# Altium PCB THYRISTOR POWER REGULATOR_V2..PcbDoc
Units mm, origin at the board's own origin, x right, y up, seen from the top; angles counter-clockwise.
Board outline 60.28 x 25.25 mm, 2 copper layers (Top Layer, Bottom Layer), stack 1.071 mm thick; 17 components, 9 nets, 27 pads, 8 vias.
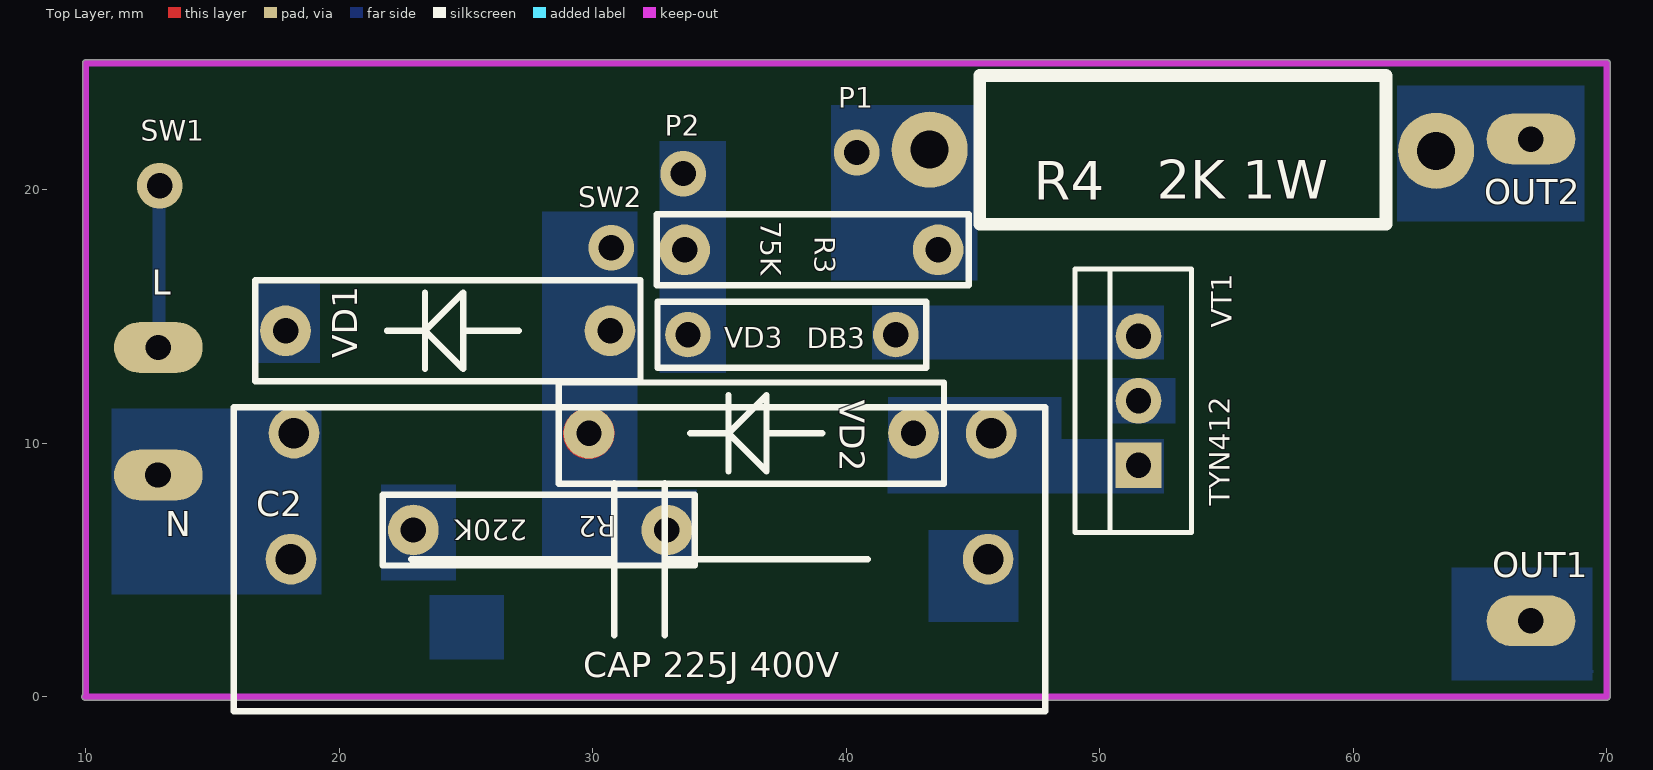
[diagram p0: Top Layer view]
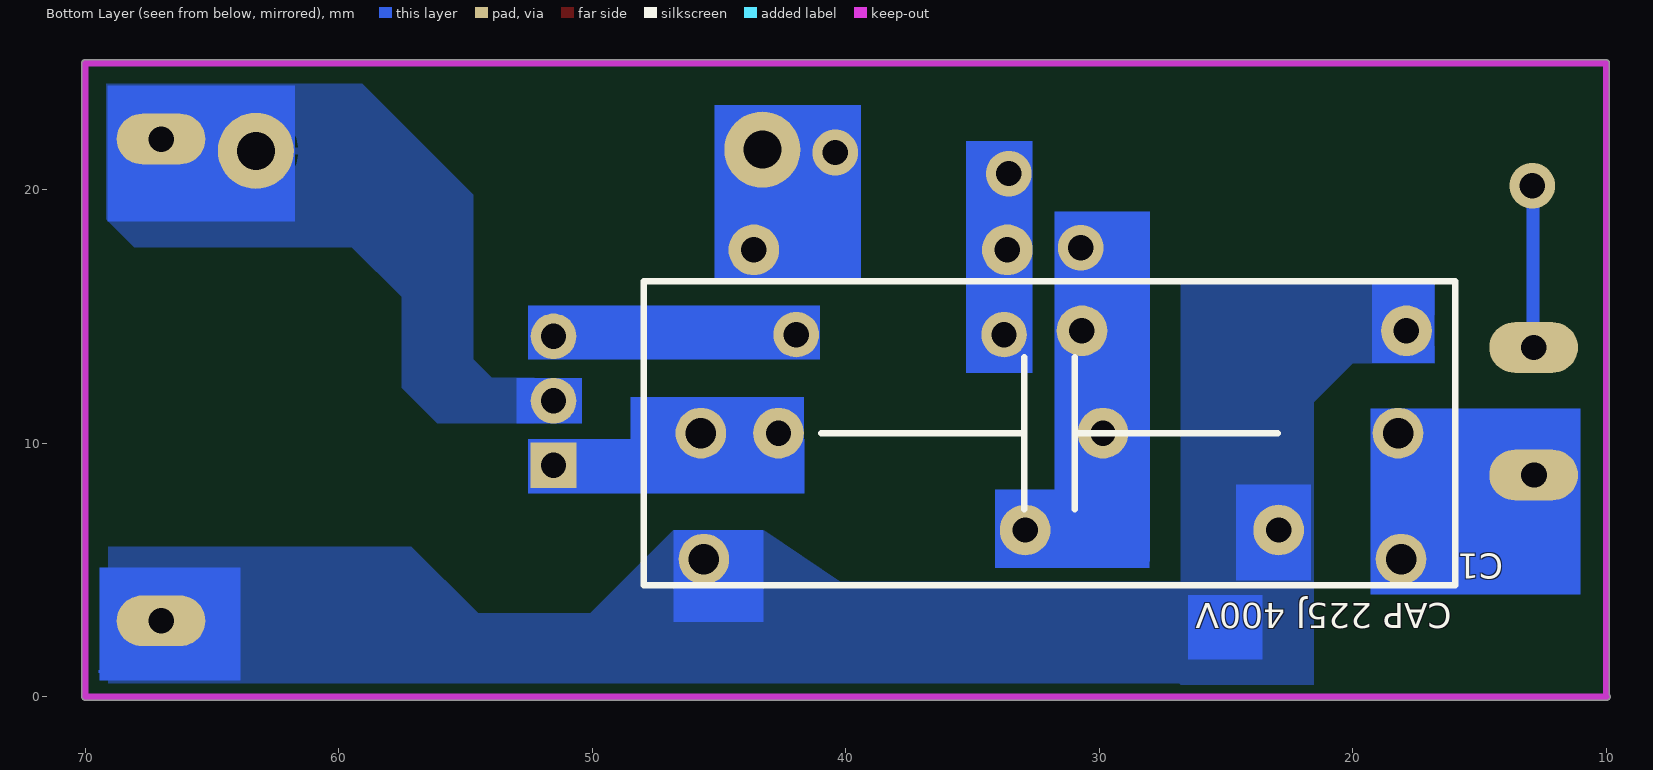
[diagram p1: Bottom Layer view, seen from below]
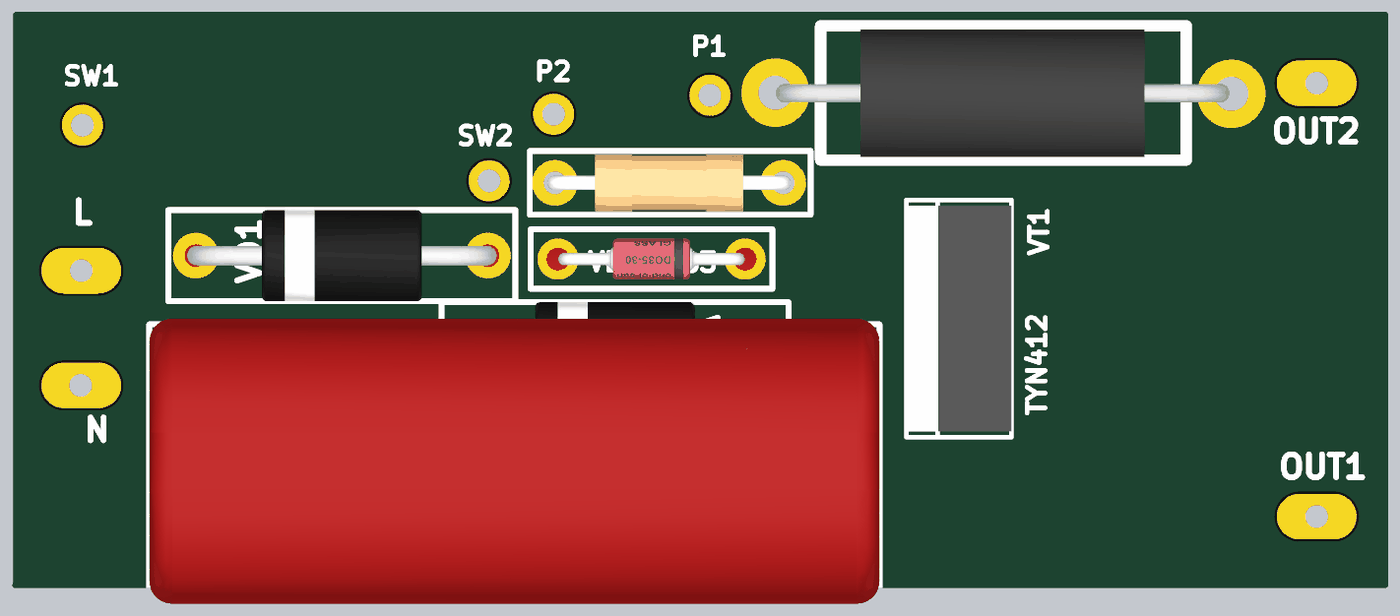
[diagram p2: 3D render of the assembled board from above, using the file's embedded part models]

## Layer stack, top to bottom
Top Solder: solder mask 0.0102, Solder Resist, Dk 3.5
Top Layer: signal copper 0.0356
Dielectric 1: dielectric 1, FR-4, Dk 4.8
Bottom Layer: signal copper 0.0356
Bottom Solder: solder mask 0.0102, Solder Resist, Dk 3.5

## Board outline
9.873,0.083 ccw(c9.97,0) 9.97,-0.127 70,-0.127 ccw(c70,0) 70.127,0 70.127,25 ccw(c70,25) 70,25.127 10,25.127 ccw(c10,25) 9.873,25

## Design rules (kind name [scope] priority, off if disabled: settings)
Clearance [All] p1: gap=0.3 ignorepadtopadclearanceinfootprint=FALSE except(0.2: Text-Text Text-Hole)
ComponentClearance [All] p1: gap=0.1 collisioncheckmode=3 verticalgap=0.1 showdistances=FALSE
DiffPairsRouting [All] p1: maxlimit=0.254 minlimit=0.254 mostfreqgap=0.254 substack1={A23D90DD-733B-49C5-8102-56B3D284E3A0} toplayer_{a23d90dd-733b-49c5-8102-56b3d284e3a0}_minwidth=0.381 toplayer_{a23d90dd-733b-49c5-8102-56b3d284e3a0}_maxwidth=0.381 toplayer_{a23d90dd-733b-49c5-8102-56b3d284e3a0}_prefwidth=0.381 bottomlayer_{a23d90dd-733b-49c5-8102-56b3d284e3a0}_minwidth=0.381 bottomlayer_{a23d90dd-733b-49c5-8102-56b3d284e3a0}_maxwidth=0.381 bottomlayer_{a23d90dd-733b-49c5-8102-56b3d284e3a0}_prefwidth=0.381 toplayer_minwidth=0.381 toplayer_maxwidth=0.381 toplayer_prefwidth=0.381 bottomlayer_minwidth=0.381 bottomlayer_maxwidth=0.381 bottomlayer_prefwidth=0.381 substack2={0B3DB408-A969-412D-8C07-BA8AE97219D9} toplayer_{0b3db408-a969-412d-8c07-ba8ae97219d9}_minwidth=0.381 toplayer_{0b3db408-a969-412d-8c07-ba8ae97219d9}_maxwidth=0.381 toplayer_{0b3db408-a969-412d-8c07-ba8ae97219d9}_prefwidth=0.381 bottomlayer_{0b3db408-a969-412d-8c07-ba8ae97219d9}_minwidth=0.381 bottomlayer_{0b3db408-a969-412d-8c07-ba8ae97219d9}_maxwidth=0.381 bottomlayer_{0b3db408-a969-412d-8c07-ba8ae97219d9}_prefwidth=0.381 substack3={378827E6-B38F-4565-9D2F-710D8D441C30} toplayer_{378827e6-b38f-4565-9d2f-710d8d441c30}_minwidth=0.381 toplayer_{378827e6-b38f-4565-9d2f-710d8d441c30}_maxwidth=0.381 toplayer_{378827e6-b38f-4565-9d2f-710d8d441c30}_prefwidth=0.381 bottomlayer_{378827e6-b38f-4565-9d2f-710d8d441c30}_minwidth=0.381 bottomlayer_{378827e6-b38f-4565-9d2f-710d8d441c30}_maxwidth=0.381 bottomlayer_{378827e6-b38f-4565-9d2f-710d8d441c30}_prefwidth=0.381 substack4={1E65D4A7-266F-4925-B814-5E9C4A66F8EE} toplayer_{1e65d4a7-266f-4925-b814-5e9c4a66f8ee}_minwidth=0.381 toplayer_{1e65d4a7-266f-4925-b814-5e9c4a66f8ee}_maxwidth=0.381 toplayer_{1e65d4a7-266f-4925-b814-5e9c4a66f8ee}_prefwidth=0.381 bottomlayer_{1e65d4a7-266f-4925-b814-5e9c4a66f8ee}_minwidth=0.381 bottomlayer_{1e65d4a7-266f-4925-b814-5e9c4a66f8ee}_maxwidth=0.381 bottomlayer_{1e65d4a7-266f-4925-b814-5e9c4a66f8ee}_prefwidth=0.381 substack5={93C5D03E-862D-45F8-9871-970EEA9B3F11} toplayer_{93c5d03e-862d-45f8-9871-970eea9b3f11}_minwidth=0.381 toplayer_{93c5d03e-862d-45f8-9871-970eea9b3f11}_maxwidth=0.381 toplayer_{93c5d03e-862d-45f8-9871-970eea9b3f11}_prefwidth=0.381 bottomlayer_{93c5d03e-862d-45f8-9871-970eea9b3f11}_minwidth=0.381 bottomlayer_{93c5d03e-862d-45f8-9871-970eea9b3f11}_maxwidth=0.381 bottomlayer_{93c5d03e-862d-45f8-9871-970eea9b3f11}_prefwidth=0.381 maxuncoupledlength=12.7
Height [All] p1: minheight=0 maxheight=30 prefheight=30
HoleSize [All] p1: absolutevalues=TRUE maxlimit=6 minlimit=0.01 maxpercent=80.000 minpercent=20.000
HoleToHoleClearance [All] p1: gap=0.1 allowstackedmicrovias=TRUE
MinimumSolderMaskSliver [All] p1: minsoldermaskwidth=0.1
PlaneConnect [All] p1: pad.planeconnectstyle=Relief pad.reliefexpansion=0.5 pad.reliefentries=4 pad.reliefconductorwidth=0.5 pad.reliefairgap=0.15 via.planeconnectstyle=Direct via.reliefexpansion=0.5 via.reliefentries=4 via.reliefconductorwidth=0.5 via.reliefairgap=0.15
PolygonConnect VQFN20 [HasFootprint('VQFN20')] p1: connectstyle=Direct reliefconductorwidth=0.254 reliefentries=4 polygonreliefangle="90 Angle" airgapwidth=0.254
PolygonConnect [All] p2: thpad.connectstyle=Relief thpad.reliefconductorwidth=0.3 thpad.reliefentries=4 thpad.polygonreliefangle="90 Angle" thpad.airgapwidth=0.15 smdpad.connectstyle=Relief smdpad.reliefconductorwidth=0.3 smdpad.reliefentries=4 smdpad.polygonreliefangle="90 Angle" smdpad.airgapwidth=0.15 via.connectstyle=Direct via.reliefconductorwidth=0.3 via.reliefentries=4 via.polygonreliefangle="90 Angle" via.airgapwidth=0.15
RoutingVias [All] p1: holewidth=0.1 width=0.1 viastyle="Through Hole" minholewidth=0.11 minwidth=0.1 maxholewidth=2 maxwidth=1
ShortCircuit [All] p1: allowed=TRUE
SilkToSolderMaskClearance [IsPad] p1: minsilkscreentomaskgap=0.1 clearancetoexposedcopper=TRUE
SolderMaskExpansion SolderMaskExpansion_Via [IsVia] p1: expansion=0.102 istentingtop=TRUE
SolderMaskExpansion [All] p2: expansion=0.01 istentingtop=FALSE
UnRoutedNet [All] p1: checkbadconnections=TRUE
Width [All] p1: maxlimit=5 minlimit=0.2 preferedwidth=0.3 substack1={A23D90DD-733B-49C5-8102-56B3D284E3A0} substack2={0B3DB408-A969-412D-8C07-BA8AE97219D9} substack3={378827E6-B38F-4565-9D2F-710D8D441C30} substack4={1E65D4A7-266F-4925-B814-5E9C4A66F8EE} substack5={93C5D03E-862D-45F8-9871-970EEA9B3F11}
20 further rules are at their usual default settings.

## Components (designator, comment, footprint, x,y, rotation, side; value= is the part's Value field where it differs from the comment)
C1 "CAP 225J 400V" "CAP 225J 400V" 31.96,10.4 r180 bottom locked
C2 "CAP 225J 400V" "CAP 225J 400V" 31.84,5.43 r180 top locked
L "Test_Point_PCB" Test_Point#1 12.86,13.78 r90 top
N "Test_Point_PCB" Test_Point#2 12.83,8.75 r90 top locked
OUT1 "Test_Point_PCB" Test_Point#1 67,3 r90 top locked
OUT2 "Test_Point_PCB" Test_Point#1 67,22 r90 top locked
P1 "Test_Point_PCB" Test_Point#3 40.41,21.47 r90 top
P2 "Test_Point_PCB" Test_Point#3 33.56,20.64 r90 top
R2 "220K" RES025W 27.92,6.58 r180 top
R3 "75K" RES025W 38.62,17.63 r0 top
R4 "2K 1W" RES-2W 53.16,21.56 r0 top locked
SW1 "Test_Point_PCB" Test_Point#3 12.91,20.16 r90 top
SW2 "Test_Point_PCB" Test_Point#3 30.73,17.72 r90 top
VD1 "DIODE" FR207 24.28,14.44 r0 top
VD2 "DIODE" FR207 36.25,10.4 r0 top
VD3 "DB3" DB3 37.85,14.289 r180 top
VT1 "TYN412" TO-220-3 49.12,11.68 r90 top

## Footprints (in the part's own frame and the unit in brackets; to place one, negate y for a bottom-side part, rotate by r counter-clockwise, add the part's x,y. Pads: shape width x height; smd on the part's side, far side on the other; paste and mask are expansions set on the pad)
"CAP 225J 400V" [mm]
  round 2 hole 1.2: 1(-13.75,0) 2(13.75,0)
  silkscreen extent -16,-6 16,6, body extent -16,-6.25 16,6.25, height 26.5
DB3 [mm]
  round 1.8 hole 1: 1(-4.1,0) 2(4.1,0)
  silkscreen extent -5.3,-1.3 5.3,1.3, body extent -4.09,-0.89 4.09,0.89, height 1.82
FR207 [mm]
  round 2 hole 1: 1(-6.4,0) 2(6.4,0)
  silkscreen extent -7.6,-2 7.6,2, body extent -6.78,-2 6.78,2, height 4.49
RES025W [mm]
  round 2 hole 1: 1(-5,0) 2(5,0)
  silkscreen extent -6.1,-1.4 6.2,1.4, body extent -5.33,-1.24 5.33,1.24, height 1.55
RES-2W [mm]
  round 3 hole 1.5: 1(-9.875,0.025) 2(10.1,-0.025)
  silkscreen extent -7.9,-2.93 8.13,2.95, body extent -9.86,-2.78 10.01,2.78, height 5.59
Test_Point#1 [mm]
  oval 2x3.5 hole 1 unplated paste+0.102 mask+0.102: 1(0,0)
Test_Point#2 [mm]
  oval 2x3.5 hole 1 unplated paste+0.102 mask+0.102: 1(0,-0.03)
Test_Point#3 [mm]
  round 1.8 hole 1 unplated paste+0.102 mask+0.102: 1(0,0)
TO-220-3 [mm]
  rect 1.8x1.8 hole 1: 1(-2.54,-2.4)
  round 1.8 hole 1: 2(0,-2.4) 3(2.54,-2.4)
  silkscreen extent -5.2,-4.5 5.2,0.1, body extent -4.95,-4.5 4.95,0, height 18.8

## Part data
L N OUT1 OUT2 P1 P2 SW1 SW2: library part TP_PCB?, "Test_Point"
R2 R3: library part RES
R4: library part RES-CONST, "10K"
VD3: library part DIODE

## Via types
v1: diameter 1.8, hole 1, Top Layer to Bottom Layer, tented both sides, 8 vias

## Nets (pads, with @x,y where several pads share a name; then routed paths per layer and width w, separated by ;. In a path a pad name is that pad's centre, name@x,y a point inside that pad or via, vN(x,y) a via of type N, cw(c..) or ccw(c..) an arc to the next point about the centre after c; other vN are vias at no path point)
NetC1_1: C1.1 VD2.2 VT1.1
NetC1_2: C1.2 C2.2 N.1 | length 0.8
  Bottom Layer w2: v1(12.83,8.75) N.1@13.64,8.75
NetC2_1: C2.1 OUT1.1 R2.2 VD1.1
  other v1: 67,3
NetL_1: L.1 SW1.1 | length 6.4
  Bottom Layer w0.5: L.1@12.885,13.805 SW1.1@12.885,20.135
  Bottom Layer w1: v1(12.86,13.78) L.1@12.885,13.805 ; SW1.1@12.885,20.135 v1(12.91,20.16)
NetOUT2_1: OUT2.1 R4.2 VT1.2
  other v1: 67,22
NetP1_1: P1.1 R3.2 R4.1
  other v1: 40.41,21.47
NetP2_1: P2.1 R3.1 VD3.2 | length 0
  Bottom Layer w1: R3.1@33.605,17.645 R3.1
  other v1: 33.56,20.64
NetR2_1: R2.1 SW2.1 VD1.2 VD2.1 | length 0
  Top Layer w2: VD2.1@29.83,10.38 VD2.1
  other v1: 30.73,17.72
NetVD3_1: VD3.1 VT1.3

## Polygon pours and split planes (outlines as drawn)
NetOUT2_1 on Bottom Layer "NONET_L-01_P-001" (solid, pour order 2): 50.39,10.78 50.4,10.79 56.1,10.79 57.506,12.196 57.515,15.775 59.47,17.73 68.062,17.73 69.17,18.838 69.17,24.19 59.06,24.19 54.684,19.814 54.684,13.314 53.95,12.58 50.4,12.58
NetC2_1 on Bottom Layer "NONET_L-01_P-001" (solid, pour order 1): 16.76,16.4 16.76,13.16 20,13.16 21.54,11.62 21.54,0.47 26.78,0.47 26.89,0.58 26.773,0.697 26.773,16.4
NetC2_1 on Bottom Layer "NONET_L-01_P-001" (solid, pour order 0): 69.08,5.93 69.08,0.53 48.33,0.53 23.42,0.53 23.42,4.54 40.205,4.54 43.19,6.55 46.79,6.58 50.08,3.29 54.49,3.29 57.13,5.93

## Keep-outs
Keep-Out Layer:
  lines w0.254: 9.97,0 70,0 ; 10,0 10,25 70,25 ; 70,0.04 70,24.976

## Other copper
Bottom Layer:
  rectangle net NetR2_1: 28.01,5.09 34.1,8.17
  rectangle net NetC1_1: 41.65,8.17 48.48,11.83
  rectangle net NetC1_1: 41.62,8.024 52.523,10.164
  rectangle net NetOUT2_1: 50.4,10.79 52.98,12.58
  rectangle net NetR2_1: 28,5.34 31.76,19.14
  rectangle net NetP2_1: 32.62,12.78 35.245,21.933
  rectangle net NetC2_1: 21.64,4.58 24.6,8.38
  rectangle net NetC2_1: 16.78,13.16 19.24,16.3
  rectangle net NetC2_1: 43.23,2.96 46.79,6.59
  rectangle net NetC2_1: 63.87,0.65 69.43,5.11
  rectangle net NetC2_1: 69.37,0.94 69.47,1.05
  rectangle net NetC2_1: 64.39,1.48 69.28,4.45
  rectangle net NetC2_1: 23.56,1.48 26.49,4.01
  rectangle net NetVD3_1: 41.02,13.3 52.52,15.44
  rectangle net NetC1_2: 11.02,4.04 19.29,11.37
  rectangle net NetP1_1: 39.39,16.43 45.17,23.34
  rectangle net NetOUT2_1: 61.71,18.74 69.11,24.12